# Altium PCB PCB1.PcbDoc (part 3 of 3)
Units mil, origin at the board's own origin, x right, y up, seen from the top; angles counter-clockwise.
Board outline 3898.53 x 2644.2 mil, 4 copper layers (Top Layer, Layer 1, Layer 2, Bottom Layer), stack 64.602 mil thick; 147 components, 160 nets, 823 pads, 446 vias.
Unrouted connection lines stored in the file: 1.
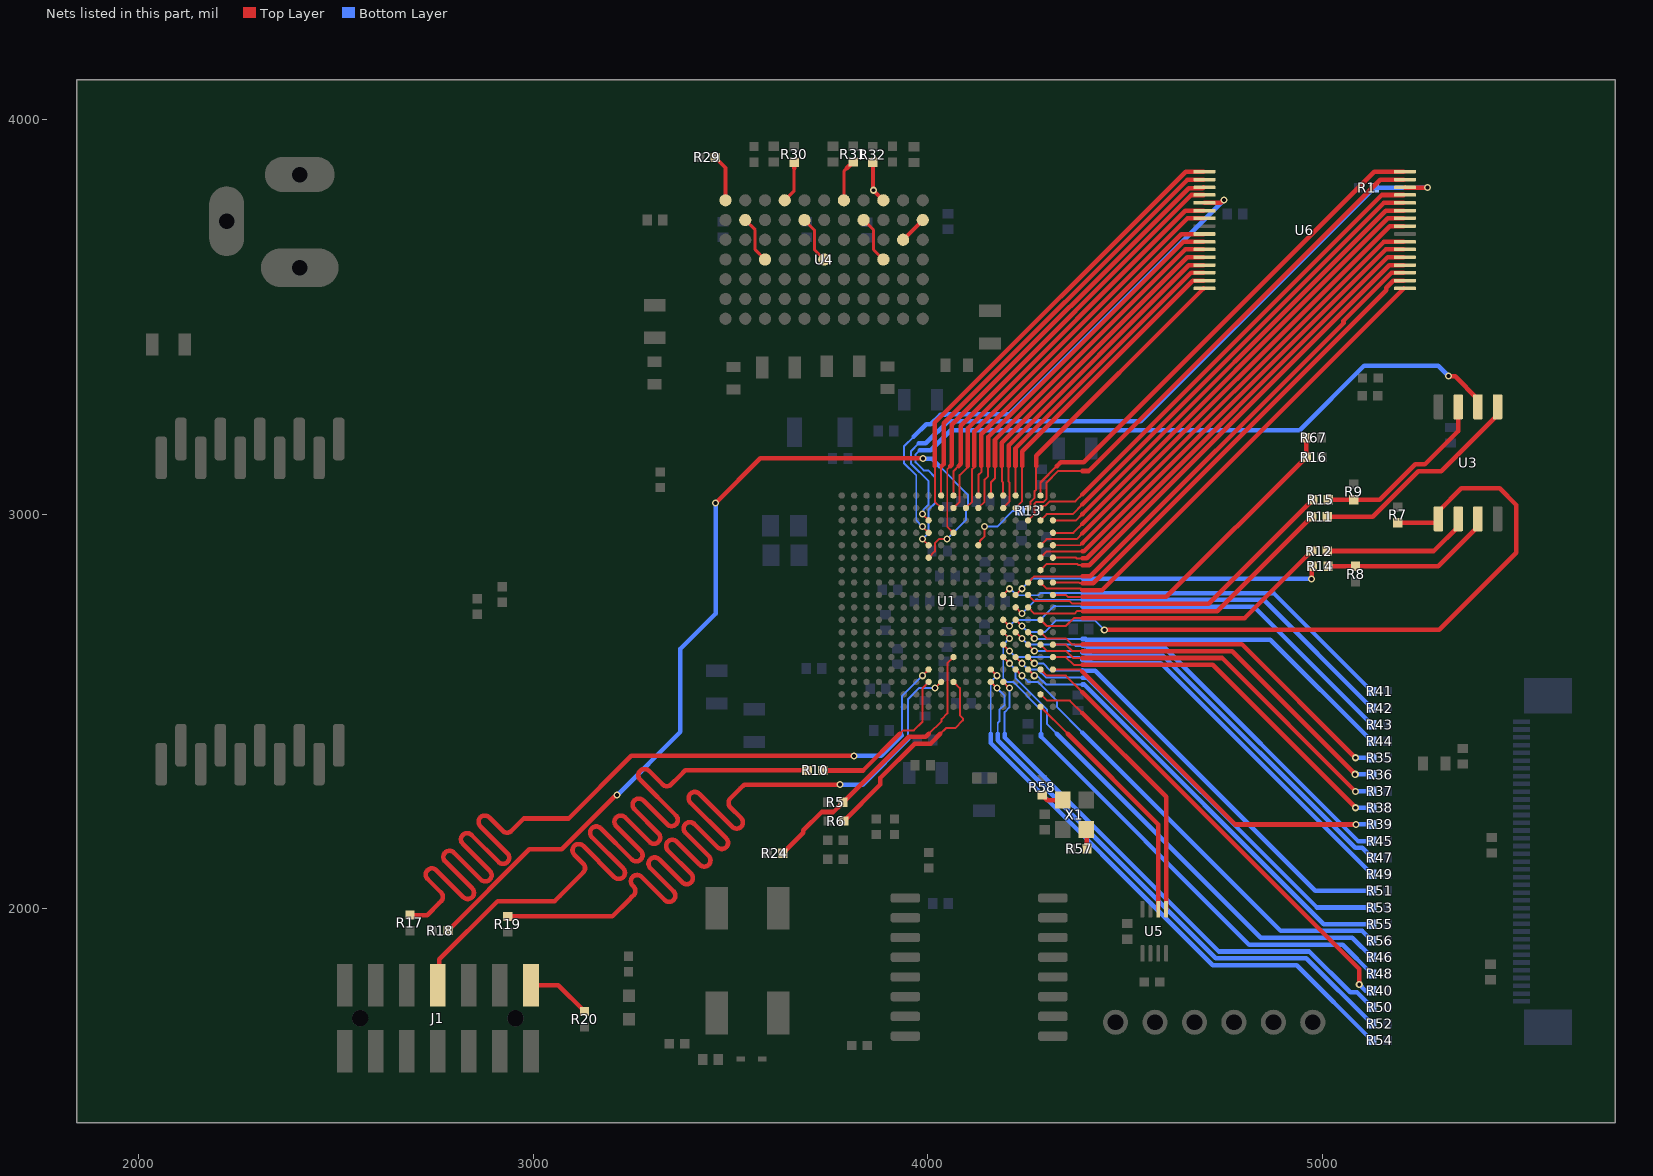
[diagram p5: the nets of this part, all layers, seen from the top]

## Via types
v1: diameter 18/10/10/18 (per signal layer), hole 10, Top Layer to Bottom Layer, tented top, 241 vias
v2: diameter 18/10/10/18 (per signal layer), hole 10, Top Layer to Bottom Layer, 173 vias
v3: diameter 30, hole 26, Top Layer to Bottom Layer, 32 vias

## Nets (pads, with @x,y where several pads share a name; then routed paths per layer and width w, separated by ;. In a path a pad name is that pad's centre, name@x,y a point inside that pad or via, vN(x,y) a via of type N, cw(c..) or ccw(c..) an arc to the next point about the centre after c; other vN are vias at no path point) (continued)
NetJ1_14: J1.14 R20.2 | length 163.4
  Top Layer w11.55: J1.14@2994.05,1806.79 3063.22,1806.79 R20.2@3129.87,1740.13
NetR6_2: R6.2 U1.T10 | length 524.7
  Top Layer w5: 4031.53,2443.9 4045.96,2458.33 4068.96,2458.33 4088.84,2478.21 4088.84,2483.01 4080.89,2490.96 4080.89,2559.59 U1.T10@4064.98,2575.51
  Top Layer w11.55: R6.2@3786.76,2222.82 3879.5,2315.55 3879.5,2332.08 3966.58,2419.17 4006.8,2419.17 4031.53,2443.9
NetR7_2: R7.2 U1.L15 U3.1 | length 1874.9
  Top Layer w5: U1.L15@4222.46,2732.99 v1(4238.21,2717.24)
  Top Layer w11.55: v2(4447.13,2707.33) 5296.27,2707.33 5491.53,2902.59 5491.53,3023.98 5449.22,3066.29 5351.92,3066.29 5294.11,3008.48 U3.1@5294.11,2988.79 5294.11,2984.98 5288.27,2979.14 R7.2@5190.65,2979.14
  Bottom Layer w5: v1(4238.21,2717.24) 4253.91,2701.54 4295.92,2701.54 4325.74,2731.37 4423.1,2731.37 v2(4447.13,2707.33)
NetR8_2: R8.2 R14.1 U3.3 | length 441.2
  Top Layer w11.55: R14.1@5014.32,2869 5014.45,2868.87 5083.85,2868.87 R8.2@5083.98,2868.74 5293.75,2868.74 5394.11,2969.11 U3.3@5394.11,2988.79
NetR9_2: R9.2 R15.1 U3.7 | length 462.3
  Top Layer w11.55: R15.1@5015.2,3037.41 R15.1@5015.2,3037.41 5079.63,3037.36 R9.2@5079.67,3037.32 5145.54,3037.32 5235.41,3127.19 5259.88,3127.19 5344.11,3211.42 U3.7@5344.11,3272.65
NetR11_1: R11.1 U3.5 | length 558.5
  Top Layer w11.55: R11.1@5012.42,2994.43 5127.16,2994.43 5242.59,3109.86 5301.01,3109.86 5444.11,3252.96 U3.5@5444.11,3272.65
NetR11_2: R11.2 U1.K16 | length 827.4
  Top Layer w5: U1.K16@4253.95,2764.49 4269.7,2748.74 4371.78,2748.74 4377.83,2754.79 4392.62,2754.79
  Top Layer w11.55: 4392.62,2754.79 4733.41,2754.79 R11.2@4973.05,2994.43
NetR12_1: R12.1 U3.2 | length 377.2
  Top Layer w11.55: R12.1@5012.23,2907.31 5282.31,2907.31 5344.11,2969.11 U3.2@5344.11,2988.79
NetR12_2: R12.2 U1.L17 | length 772.7
  Top Layer w5: U1.L17@4285.45,2732.99 4301.2,2717.24 4350.02,2717.24 4370.18,2737.4 4391.92,2737.4
  Top Layer w11.55: 4391.92,2737.4 4802.96,2737.4 R12.2@4972.86,2907.31
NetR13_1: R13.1 U1.E12 | length 161.1
  Top Layer w5: U1.E12@4127.97,2921.97 4127.97,2924.98 4132.14,2929.15 4132.14,2933.34 4143.78,2944.98 v1(4143.78,2969.35)
  Bottom Layer w5: v1(4143.78,2969.35) 4175.35,2969.35 4215.01,3009.01 R13.1@4234.57,3009.01
NetR14_2: R14.2 U1.J15 | length 801.2
  Top Layer w5: U1.J15@4222.46,2795.98 v1(4238.21,2811.73)
  Top Layer w11.55: v2(4972.1,2836.2) 4973.18,2837.29 4973.18,2867.23 R14.2@4974.95,2869
  Bottom Layer w5: v1(4238.21,2811.73) 4263.76,2837.28 4392.09,2837.28
  Bottom Layer w11.55: 4392.09,2837.28 4971.02,2837.28 v2(4972.1,2836.2)
NetR15_2: R15.2 U1.J16 | length 840.3
  Top Layer w5: U1.J16@4253.95,2795.98 4264.96,2784.97 4269.7,2780.23 4359.23,2780.23 4365.74,2773.72 4391.92,2773.72
  Top Layer w11.55: 4391.92,2773.72 4712.15,2773.72 R15.2@4975.83,3037.41
NetR16_2: R16.2 R67.1 U1.J18 | length 839.8
  Top Layer w5: U1.J18@4316.95,2795.98 4350.02,2795.98 4354.95,2791.05 4391.92,2791.05
  Top Layer w11.55: 4391.92,2791.05 4604.64,2791.05 R16.2@4958.95,3145.36 4958.58,3145.72 4958.58,3193.7 R67.1@4958.21,3194.07
NetR29_2: R29.2 U4.A7 | length 119.5
  Top Layer w10: R29.2@3461.06,3904.93 3487.16,3878.84 U4.A7@3487.16,3796.21
NetR30_2: R30.2 U4.D7 | length 106.6
  Top Layer w8: U4.D7@3637.16,3796.21 3637.16,3796.64 3660.98,3820.47 3660.98,3877.27
  Top Layer w11.55: 3660.98,3877.27 R30.2@3660.98,3892.99
NetR31_2: R31.2 U4.G7 | length 107.2
  Top Layer w8: U4.G7@3787.16,3796.21 3787.16,3869.68 3794.75,3877.27
  Top Layer w11.55: 3794.75,3877.27 R31.2@3811.01,3893.53
NetR32_2: R32.2 U4.J7 | length 107.4
  Top Layer w10: R32.2@3860.11,3892.65 3861.01,3891.75 3861.01,3822.59 v1(3861.91,3821.69) ; v1@3861.91,3821.58 U4.J7@3887.16,3796.33
NetR35_1: R35.1 U1.M17 | length 972.1
  Top Layer w5: U1.M17@4285.45,2701.49 4301.2,2685.75 4350.02,2685.75 4364.96,2670.81 4391.92,2670.81
  Top Layer w11.55: 4391.92,2670.81 4796.12,2670.81 v2(5083.62,2383.3)
  Bottom Layer w11.55: v2(5083.62,2383.3) 5084.06,2382.86 R35.1@5125.6,2382.86
NetR36_1: R36.1 U1.N18 | length 945
  Top Layer w5: U1.N18@4316.95,2670 4350.02,2670 4366.54,2653.47 4391.92,2653.47
  Top Layer w11.55: 4391.92,2653.47 4771.1,2653.47 v2(5083.15,2341.42)
  Bottom Layer w11.55: v2(5083.15,2341.42) 5083.49,2341.08 5125.26,2341.08 R36.1@5125.6,2340.74
NetR37_1: R37.1 U1.N17 | length 994.5
  Top Layer w5: U1.N17@4285.45,2670 4301.2,2654.25 4350.02,2654.25 4368.13,2636.14 4391.92,2636.14
  Top Layer w11.55: 4391.92,2636.14 4745.67,2636.14 v2(5083.86,2297.95)
  Bottom Layer w11.55: v2(5083.86,2297.95) 5084.52,2298.61 R37.1@5125.6,2298.61
NetR38_1: R38.1 U1.P18 | length 966.9
  Top Layer w5: U1.P18@4316.95,2638.5 4350.02,2638.5 4369.71,2618.81 4391.92,2618.81
  Top Layer w11.55: 4391.92,2618.81 4722.04,2618.81 v2(5084.19,2256.66)
  Bottom Layer w11.55: v2(5084.19,2256.66) 5084.36,2256.49 R38.1@5125.6,2256.49
NetR39_1: R39.1 U1.R18 | length 971.5
  Top Layer w5: U1.R18@4316.95,2607.01 4350.02,2607.01 4385.81,2607.01 4391.92,2600.9
  Top Layer w11.55: 4391.92,2600.9 4778.72,2214.09 v2(5084.74,2214.09)
  Bottom Layer w11.55: v2(5084.74,2214.09) 5085.02,2214.37 R39.1@5125.6,2214.37
NetR40_1: R40.1 U1.R17 | length 1200
  Top Layer w5: U1.R17@4285.45,2607.01 4301.2,2591.26 4350.02,2591.26 4391.92,2549.35
  Top Layer w11.55: 4391.92,2549.35 5093.38,1847.89 v2(5093.38,1809.02)
  Bottom Layer w11.55: v2(5093.38,1809.02) 5109.27,1793.13 R40.1@5125.6,1793.13
NetR41_1: R41.1 U1.J14 | length 1053.7
  Top Layer w5: U1.J14@4190.96,2795.98 v1(4206.71,2811.73)
  Bottom Layer w5: v1(4206.71,2811.73) 4208.24,2811.73 4224.76,2795.22 4280.29,2795.22 4285.91,2800.84 4391.92,2800.84
  Bottom Layer w11.55: 4391.92,2800.84 4876.12,2800.84 R41.1@5125.6,2551.36
NetR42_1: R42.1 U1.K15 | length 1037.9
  Top Layer w5: U1.K15@4222.46,2764.49 v1(4238.21,2748.74)
  Bottom Layer w5: v1(4238.21,2748.74) 4272.16,2782.69 4273.62,2784.15 4277.76,2784.15 4391.92,2783.5
  Bottom Layer w11.55: 4391.92,2783.5 4851.33,2783.5 R42.1@5125.6,2509.23
NetR43_1: R43.1 U1.L14 | length 1085.9
  Top Layer w5: U1.L14@4190.96,2732.99 v1(4206.71,2717.24)
  Bottom Layer w5: v1(4206.71,2717.24) 4222.51,2733.04 4284.89,2733.04 4317.86,2766.01 4319.32,2767.47 4323.46,2767.47 4391.92,2766.17
  Bottom Layer w11.55: 4391.92,2766.17 4826.54,2766.17 R43.1@5125.6,2467.11
NetR44_1: R44.1 U1.M16 | length 986.2
  Top Layer w5: U1.M16@4253.95,2701.49 v1(4269.7,2685.75)
  Bottom Layer w5: v1(4269.7,2685.75) 4271.23,2684.22 4391.92,2684.22
  Bottom Layer w11.55: 4400.96,2682.58 4403.77,2682.58 4403.95,2682.4 4868.18,2682.4 R44.1@5125.6,2424.98
  Bottom Layer w12.07: 4391.92,2684.22 4397.16,2684.22 4397.32,2684.05 4399.49,2684.05 4400.96,2682.58
NetR45_1: R45.1 U1.M15 | length 1120.9
  Top Layer w5: U1.M15@4222.46,2701.49 v1(4238.21,2685.75)
  Bottom Layer w5: v1(4238.21,2685.75) 4254,2669.95 4371.11,2669.95 4374.17,2666.89 4391.92,2666.89
  Bottom Layer w11.55: 4391.92,2666.89 4392.14,2666.89 4412.52,2661.94 4600.67,2661.94 5090.37,2172.24 R45.1@5125.6,2172.24
NetR46_2: R46.2 U1.P14 | length 1284.3
  Top Layer w5: U1.P14@4190.96,2638.5 v1(4206.71,2622.75)
  Bottom Layer w5: v1(4206.71,2622.75) 4222.51,2606.96 4222.51,2584.75 4302.2,2505.06 4302.2,2468.53 4326.83,2443.9
  Bottom Layer w11.55: 4326.83,2443.9 4843.77,1926.96 5076.02,1926.96 R46.2@5125.6,1877.38
NetR47_1: R47.1 U1.N16 | length 1093.3
  Top Layer w5: U1.N16@4253.95,2670 v1(4269.7,2654.25)
  Bottom Layer w5: v1(4269.7,2654.25) 4286.2,2654.25 4351.57,2654.25 4351.62,2654.2 4386.66,2654.2 4391.92,2648.93
  Bottom Layer w11.55: 4391.92,2648.93 4409.12,2644.76 4419.87,2642.14 4595.96,2642.14 5083.19,2154.91 5100.81,2154.91 R47.1@5125.6,2130.12
NetR48_2: R48.2 U1.M14 | length 1414.8
  Top Layer w5: U1.M14@4190.96,2701.49 v1(4206.71,2685.75)
  Bottom Layer w5: v1(4206.71,2685.75) 4191.01,2670.05 4191.01,2584.75 4200.21,2575.56 4216.38,2575.56 4286.67,2505.27 4286.67,2443.9
  Bottom Layer w11.55: 4286.67,2443.9 4286.67,2437.03 4814.08,1909.63 5051.22,1909.63 R48.2@5125.6,1835.25
NetR49_1: R49.1 U1.N14 | length 1173.5
  Top Layer w5: U1.N14@4190.96,2670 v1(4206.71,2654.25)
  Bottom Layer w5: v1(4206.71,2654.25) 4222.43,2638.53 4351.61,2638.53 4384.32,2638.53 4391.92,2630.93
  Bottom Layer w11.55: 4391.92,2630.93 4405.73,2627.58 4422.92,2623.39 4590.21,2623.39 R49.1@5125.6,2087.99
NetR50_2: R50.2 U1.T14 | length 1366.8
  Top Layer w5: U1.T14@4190.96,2575.51 v1(4206.71,2559.76)
  Bottom Layer w5: 4194.47,2443.9 4194.47,2473.83 4194.47,2499.04 4206.71,2511.28 v1(4206.71,2559.76)
  Bottom Layer w11.55: 4194.47,2443.9 4194.47,2434.66 4736.83,1892.3 4966.7,1892.3 5070.14,1788.85 5087.75,1788.85 R50.2@5125.6,1751.01
NetR51_1: R51.1 U1.P16 | length 1116.8
  Top Layer w5: U1.P16@4253.95,2638.5 v1(4269.7,2622.75)
  Bottom Layer w5: v1(4269.7,2622.75) 4291.88,2622.75 4310.22,2604.42 4391.92,2604.42
  Bottom Layer w11.55: 4391.92,2604.42 4423.84,2603.52 4981.49,2045.87 R51.1@5125.6,2045.87
NetR52_2: R52.2 U1.T13 | length 1415.8
  Top Layer w5: U1.T13@4159.47,2575.51 v1(4175.21,2559.76)
  Bottom Layer w5: v1(4175.21,2559.76) 4194.47,2540.51 4194.47,2517.92 4181.42,2504.87 4181.42,2475.74 4177.13,2471.46 4177.13,2443.9
  Bottom Layer w11.55: 4177.13,2443.9 4177.13,2427.48 4729.65,1874.96 4959.52,1874.96 R52.2@5125.6,1708.88
NetR53_1: R53.1 U1.P15 | length 1166.1
  Top Layer w5: U1.P15@4222.46,2638.5 v1(4238.21,2622.75)
  Bottom Layer w5: v1(4238.21,2622.75) 4253.91,2607.05 4278.88,2607.05 4299.6,2586.34 4391.92,2586.34
  Bottom Layer w11.55: 4391.92,2586.34 4403.54,2586.34 4986.14,2003.75 R53.1@5125.6,2003.75
NetR54_2: R54.2 U1.R13 | length 1477.9
  Top Layer w5: U1.R13@4159.47,2607.01 v1(4175.21,2591.26)
  Bottom Layer w5: 4159.33,2443.9 4159.33,2474.08 4159.33,2575.37 4163.55,2579.59 v1(4175.21,2591.26)
  Bottom Layer w11.55: 4159.33,2443.9 4159.33,2420.77 4722.47,1857.63 4934.73,1857.63 R54.2@5125.6,1666.76
NetR55_1: R55.1 U1.R16 | length 1139
  Top Layer w5: U1.R16@4253.95,2607.01 v1(4269.7,2591.26)
  Bottom Layer w5: v1(4269.7,2591.26) 4272.19,2588.77 4279.77,2588.77 4299.53,2569.01 4391.92,2569.01
  Bottom Layer w11.55: 4391.92,2569.01 4396.37,2569.01 5003.75,1961.62 R55.1@5125.6,1961.62
NetR56_1: R56.1 U1.R15 | length 1196.9
  Top Layer w5: U1.R15@4222.46,2607.01 v1(4238.21,2591.26)
  Bottom Layer w5: v1(4238.21,2591.26) 4253.91,2575.56 4278.72,2575.56 4326.87,2527.41 4326.87,2512.04 4391.92,2446.99
  Bottom Layer w11.55: 4391.92,2446.99 4894.62,1944.29 5100.81,1944.29 R56.1@5125.6,1919.5
NetR57_2: R57.2 X1.1 | length 49.1
  Top Layer w11.55: X1.1@4400.89,2201.2 4403.11,2198.98 R57.2@4403.11,2153.07
NetR58_2: R58.2 X1.3 | length 57.4
  Top Layer w11.55: R58.2@4289.82,2288.97 4302.78,2276.01 X1.3@4341.83,2276.01
NetU1_E8: U1.E8 U3.6 | length 1850.3
  Top Layer w5: v1(3986.24,2937.71) U1.E8@4001.98,2921.97
  Top Layer w11.55: v2(5319.23,3351.25) 5320.31,3350.17 5336.28,3350.17 5394.11,3292.33 U3.6@5394.11,3272.65
  Bottom Layer w5: 3979.75,3162.88 3979.64,3162.88 3968.92,3152.17 3968.92,3132.02 3989.42,3111.52 4001.15,3111.52 4018.07,3094.6 4018.07,3028.82 4002.03,3012.78 4002.03,2953.51 v1(3986.24,2937.71)
  Bottom Layer w11.55: 3979.75,3162.88 4007.64,3162.88 4058.4,3213.64 4942.12,3213.64 5105.59,3377.11 5293.37,3377.11 v2(5319.23,3351.25)
NetU4_B6: U4.B6 U4.C4 | length 120.7
  Top Layer w8: U4.B6@3537.16,3746.21 3562.16,3721.21 3562.16,3671.21 U4.C4@3587.16,3646.21
NetU4_E6: U4.E6 U4.F4 | length 106.7
  Top Layer w8: U4.E6@3697.06,3736.31 3712.66,3720.71 3712.66,3670.71 U4.F4@3737.16,3646.21
NetU4_H6: U4.H6 U4.J4 | length 120.7
  Top Layer w8: U4.H6@3837.16,3746.21 3862.16,3721.21 3862.16,3671.21 U4.J4@3887.16,3646.21
NetU4_K5: U4.K5 U4.L6 | length 70.7
  Top Layer w10: U4.K5@3937.16,3696.21 U4.L6@3987.16,3746.21
Reset_B: R5.2 R24.2 U1.P10 | length 719.8
  Top Layer w5: 4002.3,2443.9 4034.58,2476.18 4034.58,2481.07 4049.49,2495.97 4049.49,2623.01 U1.P10@4064.98,2638.5
  Top Layer w11.55: R24.2@3631.98,2140.93 3684.29,2193.25 3684.29,2199.13 3730.96,2245.8 3760.69,2245.8 3779.43,2264.53 R5.2@3785.07,2270.22 3951.36,2436.5 3994.9,2436.5 4002.3,2443.9
SRAM_A0: U1.G17 U6.20 | length 1243.8
  Top Layer w5: U1.G17@4285.45,2858.97 4301.2,2874.72 4350.02,2874.72 4378.14,2874.72 4381.31,2871.55 4391.92,2871.55
  Top Layer w11.55: 4391.92,2871.55 4409.43,2871.55 5169.58,3631.7 U6.20@5206.6,3631.7
SRAM_A1: U1.H16 U6.19 | length 1281.5
  Top Layer w5: U1.H16@4253.95,2827.48 4269.52,2843.05 4357.04,2843.05 4391.92,2843.05
  Top Layer w11.55: 4391.92,2843.05 4411.68,2843.05 5053.48,3484.85 5053.48,3491.09 5175.09,3612.7 U6.19@5206.6,3612.7
SRAM_A2: U1.H18 U6.18 | length 1211.7
  Top Layer w5: U1.H18@4316.95,2827.48 4350.02,2827.48 4383.56,2827.48 4385.32,2825.72 4391.92,2825.72
  Top Layer w11.55: 4391.92,2825.72 4418.86,2825.72 5161.48,3568.34 5161.48,3574.58 5179.6,3592.7 U6.18@5206.6,3592.7
SRAM_A3: U1.H17 U6.17 | length 1245.6
  Top Layer w5: U1.H17@4285.45,2827.48 4301.02,2811.91 4357.56,2811.91 4388.4,2811.91 4391.92,2808.39
  Top Layer w11.55: 4391.92,2808.39 4442.28,2808.39 U6.17@5206.6,3572.7
SRAM_A4: U1.B16 U6.16 | length 740.4
  Top Layer w5: U1.B16@4253.95,3016.45 4253.95,3019.47 4260.37,3025.89 4260.37,3032.35 4270.68,3042.66 4270.68,3059.25 4274.65,3063.22 4274.65,3122.88
  Top Layer w11.55: 4274.65,3122.88 4274.65,3148.75 U6.16@4698.6,3572.7
SRAM_A5: U1.B15 U6.15 | length 789.3
  Top Layer w5: U1.B15@4222.46,3016.45 4238.21,3032.2 4238.21,3081.02 4238.21,3121.66 4239.42,3122.88
  Top Layer w11.55: 4239.42,3122.88 4239.42,3160.52 4671.6,3592.7 U6.15@4698.6,3592.7
SRAM_A6: U1.A15 U6.14 | length 780.7
  Top Layer w5: 4222.09,3122.88 4222.09,3081.39 4222.46,3081.02 U1.A15@4222.46,3047.95
  Top Layer w11.55: 4222.09,3122.88 4222.09,3167.7 4667.09,3612.7 U6.14@4698.6,3612.7
SRAM_A7: U1.B14 U6.13 | length 848.8
  Top Layer w5: U1.B14@4190.96,3016.45 4206.71,3032.2 4206.71,3081.02 4204.76,3082.97 4204.76,3122.88
  Top Layer w11.55: 4204.76,3122.88 4204.76,3174.88 4661.58,3631.7 U6.13@4698.6,3631.7
SRAM_A8: U1.D10 U6.3 | length 1172
  Top Layer w5: 4057.34,3122.88 4049.1,3114.65 4049.1,3081.83 4049.1,2969.34 U1.D10@4064.98,2953.46
  Top Layer w11.55: 4057.34,3122.88 4060.76,3126.3 4060.76,3226.97 4660.82,3827.04 4696.93,3827.04 U6.3@4698.6,3828.7
SRAM_A9: U1.A9 U6.2 | length 1100
  Top Layer w5: U1.A9@4033.48,3047.95 4033.48,3081.02 4033.48,3121.3 4035.07,3122.88
  Top Layer w11.55: 4035.07,3122.88 4040,3127.82 4040,3230.73 4657.97,3848.7 U6.2@4698.6,3848.7
SRAM_A10: U1.C16 U6.31 | length 1349.7
  Top Layer w5: U1.C16@4253.95,2984.96 4269.7,3000.71 4269.7,3026.57 4275.19,3032.05 4293.47,3032.05 4301.26,3039.84 4301.26,3080.98 4330.5,3110.21 4391.92,3110.21
  Top Layer w11.55: 4391.92,3110.21 4407.8,3110.21 5146.29,3848.7 U6.31@5206.6,3848.7
SRAM_A11: U1.B9 U6.1 | length 1167.2
  Top Layer w5: 4017.73,3122.88 4017.73,3081.02 4017.73,3032.2 U1.B9@4033.48,3016.45
  Top Layer w11.55: 4017.73,3122.88 4017.73,3232.97 4653.46,3868.7 U6.1@4698.6,3868.7
SRAM_A12: U1.A14 U6.12 | length 841.3
  Top Layer w5: 4187.43,3122.88 4187.43,3084.56 4190.96,3081.02 U1.A14@4190.96,3047.95
  Top Layer w11.55: 4187.43,3122.88 4187.43,3182.06 4657.07,3651.7 U6.12@4698.6,3651.7
SRAM_A13: U1.A10 U6.4 | length 1042.1
  Top Layer w5: U1.A10@4064.98,3047.95 4064.98,3081.02 4064.98,3085.16 4064.98,3109.77 4078.09,3122.88
  Top Layer w11.55: 4078.09,3122.88 4083.43,3128.23 4083.43,3225.14 4668,3809.7 U6.4@4698.6,3809.7
SRAM_A14: U1.A13 U6.11 | length 874
  Top Layer w5: U1.A13@4159.47,3047.95 4159.47,3081.02 4170.09,3091.65 4170.09,3122.88
  Top Layer w11.55: 4170.09,3122.88 4170.09,3189.24 4652.56,3671.7 U6.11@4698.6,3671.7
SRAM_A15: U1.B11 U6.7 | length 1007.4
  Top Layer w5: U1.B11@4096.47,3016.45 4112.22,3032.2 4112.22,3081.02 4112.22,3115.02 4118.1,3120.9 4118.1,3122.88
  Top Layer w11.55: 4118.1,3122.88 4118.1,3210.78 4658.02,3750.7 U6.7@4698.6,3750.7
SRAM_A16: U1.B12 U6.10 | length 940.8
  Top Layer w5: U1.B12@4127.97,3016.45 4143.72,3032.2 4143.72,3081.02 4143.72,3088.02 4152.76,3097.07 4152.76,3122.88
  Top Layer w11.55: 4152.76,3122.88 4152.76,3196.42 4647.04,3690.7 U6.10@4698.6,3690.7
SRAM_A17: U1.A12 U6.9 | length 932
  Top Layer w5: U1.A12@4127.97,3047.95 4127.97,3081.02 4127.97,3100.02 4135.43,3107.48 4135.43,3122.88
  Top Layer w11.55: 4135.43,3122.88 4135.43,3203.6 4642.53,3710.7 U6.9@4698.6,3710.7
SRAM_A18: U1.B10 U6.6 | length 1042.7
  Top Layer w5: U1.B10@4064.98,3016.45 4080.7,3032.18 4080.7,3099.91 4100.77,3119.97 4100.77,3122.88
  Top Layer w11.55: 4100.77,3122.88 4100.77,3217.96 4652.51,3769.7 U6.6@4698.6,3769.7
SRAM_C\S\1\: R1.2 U1.C8 U6.30 | length 1851.4
  Top Layer w5: v1(3986.24,3000.71) U1.C8@4001.98,2984.96
  Top Layer w11.55: U6.30@5209.07,3828.89 5209.39,3828.57 5266.48,3828.57 v2(5266.8,3828.25)
  Bottom Layer w5: 3976.73,3180.22 3957.25,3160.73 3957.25,3128.49 4001.94,3083.8 4001.94,3025.7 3988.72,3012.49 3988.72,3003.19 v1(3986.24,3000.71)
  Bottom Layer w11.55: 3976.73,3180.22 3995.04,3180.22 4051.48,3236.66 4540.08,3236.66 5117.14,3813.72 ; 5117.14,3813.77 R1.2@5131.51,3828.13 5131.57,3828.19 5266.74,3828.19 v2(5266.8,3828.25)
SRAM_DQ0: U1.F18 U6.21 | length 1206.3
  Top Layer w5: U1.F18@4316.95,2890.47 4350.02,2890.47 4375.34,2890.47 4376.93,2888.89 4391.92,2888.89
  Top Layer w11.55: 4391.92,2888.89 4402.25,2888.89 5165.07,3651.7 U6.21@5206.6,3651.7
SRAM_DQ1: U1.F17 U6.22 | length 1244.7
  Top Layer w5: U1.F17@4285.45,2890.47 4301.2,2906.22 4350.02,2906.22 4391.92,2906.22
  Top Layer w11.55: 4391.92,2906.22 4395.07,2906.22 5160.56,3671.7 U6.22@5206.6,3671.7
SRAM_DQ2: U1.E18 U6.23 | length 1208.1
  Top Layer w5: U1.E18@4316.95,2921.97 4350.02,2921.97 4386.31,2921.97 4391.92,2927.58
  Top Layer w11.55: 4391.92,2927.58 5155.04,3690.7 U6.23@5206.6,3690.7
SRAM_DQ3: U1.E17 U6.25 | length 1256.1
  Top Layer w5: U1.E17@4285.45,2921.97 4301.2,2937.71 4350.02,2937.71 4377.55,2937.71 4391.92,2952.09
  Top Layer w11.55: 4391.92,2952.09 5170.53,3730.7 U6.25@5206.6,3730.7
SRAM_DQ4: U1.D18 U6.26 | length 1219.9
  Top Layer w5: U1.D18@4316.95,2953.46 4350.02,2953.46 4368.78,2953.46 4391.92,2976.6
  Top Layer w11.55: 4391.92,2976.6 5166.02,3750.7 U6.26@5206.6,3750.7
SRAM_DQ5: U1.C18 U6.27 | length 1214.7
  Top Layer w5: U1.C18@4316.95,2984.96 4350.02,2984.96 4375.77,2984.96 4391.92,3001.11
  Top Layer w11.55: 4391.92,3001.11 5160.51,3769.7 U6.27@5206.6,3769.7
SRAM_DQ6: U1.C17 U6.28 | length 1254.5
  Top Layer w5: U1.C17@4285.45,2984.96 4301.2,3000.71 4350.02,3000.71 4367,3000.71 4391.92,3025.63
  Top Layer w11.55: 4391.92,3025.63 5156,3789.7 U6.28@5206.6,3789.7
SRAM_DQ7: U1.B17 U6.29 | length 1249.7
  Top Layer w5: U1.B17@4285.45,3016.45 4288.46,3016.45 4294.06,3022.05 4297.61,3022.05 4308.74,3033.18 4323.06,3033.18 4323.12,3033.24 4374.02,3033.24 4391.92,3051.15
  Top Layer w11.55: 4391.92,3051.15 5150.48,3809.7 U6.29@5206.6,3809.7
SRAM_OE: U1.A17 U6.32 | length 1280.5
  Top Layer w5: U1.A17@4285.45,3047.95 4285.45,3081.02 4327.31,3122.88
  Top Layer w11.55: 4327.31,3122.88 4336.95,3132.52 4395.47,3132.52 5131.65,3868.7 U6.32@5206.6,3868.7
SRAM_WE: U1.D8 U6.5 | length 1368.6
  Top Layer w5: v1(3986.24,2969.21) U1.D8@4001.98,2953.46
  Top Layer w11.55: U6.5@4701.07,3789.89 4741.9,3789.89 4749.53,3797.52 v2(4751.06,3797.52)
  Bottom Layer w5: 3964.64,3197.53 3939.33,3172.22 3939.33,3130.47 3970.54,3099.26 3970.54,2984.91 v1(3986.24,2969.21)
  Bottom Layer w11.55: 3964.64,3197.53 3995.65,3228.54 4007.73,3228.54 4031.36,3252.18 4043.54,3252.18 4045.34,3253.99 4207.53,3253.99 v2(4751.06,3797.52)
TCK: R18.1 U1.F8 | length 2351.4
  Top Layer w5: U1.F8@4001.98,2890.47 4017.69,2906.17 4017.69,2927.06 4028.76,2938.13 v1(4048.89,2938.13)
  Top Layer w11.55: R18.1@2783.97,1945.43 2989.82,2151.27 3071.63,2151.27 3206.12,2285.76 3208.15,2285.76 3210.98,2288.59 v2(3212.51,2288.59) ; v2(3461.79,3028.7) 3575.13,3142.04 v2(3987.42,3142.04)
  Bottom Layer w5: 4028.52,3122.88 4101.59,3049.81 4101.59,3014.33 4096.51,3009.25 4096.51,2985.75 v1(4048.89,2938.13)
  Bottom Layer w11.55: v2(3212.51,2288.59) 3372.87,2448.94 3372.87,2659.64 3461.79,2748.56 v2(3461.79,3028.7) ; v2(3987.42,3142.04) 3988.5,3140.95 4010.45,3140.95 4028.52,3122.88
TDI: R19.1 U1.T9 | length 2472.4
  Top Layer w5: v1(4017.73,2559.76) U1.T9@4033.48,2575.51
  Top Layer w11.55: R19.1@2935.17,1981.12 3200.4,1981.12 3242.94,2023.67 3249.87,2030.6 3253.96,2034.68 ccw(c3242.8,2045.83) 3253.96,2056.99 3251.78,2059.17 cw(c3262.93,2070.33) 3251.78,2081.48 cw(c3262.93,2070.33) 3274.08,2081.48 3332.83,2022.73 ccw(c3343.99,2033.88) 3355.14,2022.73 ccw(c3343.99,2033.88) 3355.14,2045.04 3296.39,2103.79 cw(c3307.55,2114.94) 3296.39,2126.1 cw(c3307.55,2114.94) 3318.7,2126.1 3377.45,2067.35 ccw(c3388.61,2078.5) 3399.76,2067.35 ccw(c3388.61,2078.5) 3399.76,2089.66 3341.01,2148.41 cw(c3352.17,2159.56) 3341.01,2170.72 cw(c3352.17,2159.56) 3363.32,2170.72 3422.07,2111.97 ccw(c3433.23,2123.12) 3444.38,2111.97 ccw(c3433.23,2123.12) 3444.38,2134.28 3385.63,2193.03 cw(c3396.79,2204.18) 3385.63,2215.34 cw(c3396.78,2204.18) 3407.94,2215.34 3466.69,2156.58 ccw(c3477.84,2167.74) 3489,2156.58 ccw(c3477.84,2167.74) 3489,2178.89 3398.17,2269.72 cw(c3409.33,2280.88) 3398.17,2292.03 cw(c3409.33,2280.88) 3420.48,2292.03 3504.22,2208.29 ccw(c3515.37,2219.45) 3526.53,2208.29 ccw(c3515.37,2219.45) 3526.53,2230.6 3499.36,2257.77 cw(c3510.51,2268.93) 3499.36,2280.08 3524.78,2305.5 3534.62,2315.34 v2(3777.51,2315.34)
  Bottom Layer w5: 3949.59,2429.89 3949.59,2531.94 3977.41,2559.76 v1(4017.73,2559.76)
  Bottom Layer w11.55: v2(3777.51,2315.34) 3835.04,2315.34 3949.59,2429.89
TDO: J1.8 R10.2 | length 2270.7
  Top Layer w11.55: J1.8@2757.83,1806.79 2761.83,1810.79 2761.83,1872.19 2909.76,2020.12 3053.88,2020.12 3066.58,2032.83 3122.37,2088.61 3126.45,2092.7 ccw(c3115.3,2103.85) 3126.45,2115.01 3103.77,2137.69 cw(c3114.92,2148.84) 3103.77,2160 cw(c3114.92,2148.84) 3126.08,2160 3205.33,2080.75 ccw(c3216.48,2091.9) 3227.64,2080.75 ccw(c3216.48,2091.9) 3227.64,2103.06 3148.38,2182.31 cw(c3159.54,2193.46) 3148.38,2204.62 cw(c3159.54,2193.46) 3170.69,2204.62 3249.95,2125.37 ccw(c3261.1,2136.52) 3272.26,2125.37 ccw(c3261.1,2136.52) 3272.26,2147.67 3210.1,2209.83 cw(c3221.25,2220.99) 3210.1,2232.14 cw(c3221.25,2220.99) 3232.41,2232.14 3294.56,2169.98 ccw(c3305.72,2181.14) 3316.87,2169.98 ccw(c3305.72,2181.14) 3316.87,2192.29 3256.25,2252.92 cw(c3267.4,2264.07) 3256.25,2275.23 cw(c3267.4,2264.07) 3278.56,2275.23 3339.18,2214.6 ccw(c3350.34,2225.76) 3361.49,2214.6 ccw(c3350.34,2225.76) 3361.49,2236.91 3270.66,2327.74 cw(c3281.82,2338.89) 3270.66,2350.05 cw(c3281.82,2338.89) 3292.97,2350.05 3327.23,2315.79 ccw(c3338.39,2326.94) 3349.54,2315.79 3370.83,2337.07 3385.13,2351.37 3693.95,2351.37 R10.2@3694.26,2351.06
TDO_Driver: R10.1 U1.T8 | length 411.3
  Top Layer w5: 3928.49,2443.9 3937.47,2452.88 3964.72,2452.88 3986.41,2474.57 3986.41,2559.93 U1.T8@4001.98,2575.51
  Top Layer w11.55: R10.1@3733.63,2351.06 3835.66,2351.06 3928.49,2443.9
TMS: R17.1 U1.R8 | length 2453.1
  Top Layer w5: v1(3986.24,2591.26) U1.R8@4001.98,2607.01
  Top Layer w11.55: R17.1@2687.28,1984.56 2731.16,1984.56 2762,2015.4 2766.08,2019.48 ccw(c2754.93,2030.63) 2766.08,2041.79 2731.82,2076.05 cw(c2742.98,2087.2) 2731.82,2098.36 cw(c2742.98,2087.2) 2754.13,2098.36 2822.66,2029.83 ccw(c2833.82,2040.98) 2844.97,2029.83 ccw(c2833.82,2040.98) 2844.97,2052.14 2776.44,2120.67 cw(c2787.6,2131.82) 2776.44,2142.98 cw(c2787.6,2131.82) 2798.75,2142.98 2867.28,2074.45 ccw(c2878.43,2085.6) 2889.59,2074.45 ccw(c2878.43,2085.6) 2889.59,2096.76 2821.06,2165.29 cw(c2832.22,2176.44) 2821.06,2187.59 cw(c2832.22,2176.44) 2843.37,2187.59 2911.9,2119.07 ccw(c2923.05,2130.22) 2934.21,2119.07 ccw(c2923.05,2130.22) 2934.21,2141.37 2865.68,2209.9 cw(c2876.83,2221.06) 2865.68,2232.21 cw(c2876.83,2221.06) 2887.99,2232.21 2922.25,2197.95 ccw(c2933.4,2209.11) 2944.56,2197.95 2974.53,2227.92 2975.88,2229.28 3089.51,2229.28 3248.45,2388.21 v2(3812.74,2388.21)
  Bottom Layer w5: 3933.82,2440.59 3933.82,2538.84 v1(3986.24,2591.26)
  Bottom Layer w11.55: v2(3812.74,2388.21) 3882.33,2388.21 3933.82,2439.71 3933.82,2440.59
UART0_RX: U1.V17 U5.6 | length 636.8
  Top Layer w5: U1.V17@4285.45,2512.52 4354.07,2443.9
  Top Layer w11.55: 4354.07,2443.9 4583.86,2214.11 U5.6@4583.86,1999.27
UART0_TX: U1.U17 U5.5 | length 711
  Top Layer w5: U1.U17@4285.45,2544.01 4286.48,2544.01 4302.18,2528.31 4359.78,2528.31 4391.92,2496.17
  Top Layer w11.55: 4391.92,2496.17 4603.86,2284.23 U5.5@4603.86,1999.27
pads on no net: J1. J1.12 J5.12 J5.13 J5.14 J5.15 J5.21 J6.2 J6.3 J6.6 U1.A3 U1.A4 U1.B1 U1.B2 U1.B5 U1.B6 U1.C9 U1.C11 U1.C12 U1.C13 U1.C14 U1.D1 U1.D2 U1.D5 U1.D6 U1.D9 U1.D11 U1.D13 U1.D14 U1.D15 U1.D16 U1.E3 U1.E4 U1.E13 U1.E15 U1.E16 U1.F1 U1.F2 U1.F14 U1.F15 U1.G14 U1.G15 U1.G16 U1.H1 U1.H2 U1.H14 U1.J5 U1.J6 U1.K5 U1.K6 U1.K17 U1.K18 U1.L3 U1.L4 U1.L5 U1.L18 U1.M4 U1.M5 U1.M6 U1.N3 U1.N4 U1.N6 U1.P3 U1.P4 U1.P5 U1.P6 U1.R3 U1.R5 U1.R6 U1.R7 U1.T3 U1.T4 U1.T5 U1.T7 U1.T12 U1.T17 U1.T18 U1.U4 U1.U5 U1.U6 U1.U7 U1.U9 U1.U10 U1.U16 U1.V3 U1.V4 U1.V6 U1.V7 U1.V8 U1.V9 U1.V11 U1.V16 U2.4 U2.5 U2.6 U2.11 U2.12 U2.13 U2.14 U4.B7 U4.C7 U4.E7 U4.F2 U4.F3 U4.H7 U4.J2 U4.J3 U4.L7

## Polygon pours and split planes (outlines as drawn)
+3V1 on Top Layer "+3V1_L01_P026" (solid, pour order 26): 3964.47,3404.57 4057.61,3404.79 4069.4,3393.01 4069.4,3327.65 4065.62,3323.87 3983.81,3323.87 3964.02,3343.65
+3V3 on Top Layer "+3V3_L01_P023" (solid, pour order 23): 3795.83,3339.05 3796.34,3338.55 4011.86,3338.55 4011.86,3335.52 4061.83,3285.55 4007.32,3231.04 3953.31,3231.04 3953.31,3253.75 3950.79,3256.27 3793.31,3256.27
+1V8 on Top Layer "+1V8_L01_P022" (solid, pour order 22): 3236.13,3352.01 3237.24,3353.12 3452.91,3353.12 3452.91,3291.98 3390.1,3229.17 3237.79,3229.17
+1V0 on Top Layer "+1V0_L01_P015" (solid, pour order 15): 3466.53,3338.6 3467.19,3337.94 3599.82,3337.94 3599.82,3253.99 3565.52,3219.69 3519.46,3219.69 3519.46,3220.34 3465.88,3273.92
+3V1Reg on Top Layer "+3V1REG_L01_P013" (solid, pour order 13): 3838.76,3452.03 3838.95,3452.22 3984.24,3452.22 4014.99,3482.97 4014.99,3544.46 4192.09,3544.46 4193.65,3542.91 4193.65,3416.02 4132.93,3355.3 4131.76,3356.47 4074.15,3356.47 4074.15,3395 4055.47,3413.68 3877.98,3413.68 3876.81,3414.85
+3V3Reg on Top Layer "+3V3REG_L01_P012" (solid, pour order 12): 3694.77,3452.32 3695.04,3452.05 3831.23,3452.05 3881.33,3401.95 3920.65,3401.95 3920.65,3346.83 3921.05,3346.43 3703.03,3346.43 3703.03,3443.28 3702.62,3443.69
+1V0Reg on Top Layer "+1V0REG_L01_P002" (solid, pour order 2): 3637.61,3454.66 3534.75,3454.66 3480.32,3400.23 3463.18,3400.23 3463.18,3347.51 3466.61,3344.08 3599.47,3344.08 3599.47,3407.51 3637.61,3445.66
+1V8Reg on Top Layer "+1V8REG_L01_P005" (solid, pour order 5): 3445.3,3592.8 3445.3,3396.4 3407.66,3358.76 3306.3,3358.76 3306.3,3580.36
+1V8Reg on Top Layer "+1V8REG_L01_P000" (solid, pour order 0): 3494.39,3616.66
+3V3 on Layer 2 "+3V3_L03_P018" (solid, pour order 18): 3794.8,3340.9 3797.35,3338.34 4213.46,3338.34 4213.46,4096.54 4219.06,4102.14 5779.73,4102.14 5779.73,1457.94 2390.2,1457.94 2390.2,1881.18 3374.58,2258.59 3571.6,2258.59 3776.57,2463.55
GND on Layer 2 "GND_L03_P027" (solid, pour order 27): 1778.2,4102.14 1778.2,1457.94 3343.24,1457.94 3345.67,1455.51 3345.67,4097.31
+1V8 on Layer 2 "+1V8_L03_P017" (solid, pour order 17): 3454.05,3351.81 3452.99,3352.87 3235.16,3352.87 3235.16,3288.36 3709.95,2813.57 3709.95,2530.17 3776.57,2463.55 3925.67,2463.55 3925.67,2492.37 4017.73,2559.76 4063.91,2564.61 4197.32,2564.61 4197.32,2895.41 4141.99,2950.75 4098.16,2950.75 4098.16,2857.29 4143.72,2811.73 4139.81,2807.82 4139.81,2762.12 4090.1,2712.44 4090.1,2676.37 4055.98,2676.37 3942.5,2789.86 3942.5,2964.14
+3V3 on Layer 2 "+3V3_L03_P011" (solid, pour order 11): 3953.39,3151.1 3954.74,3149.75 3954.74,2924.46 3991.21,2924.46 4009.72,2942.97 4009.72,3016.36 4059.33,3016.36 4078.74,3035.77 4078.74,3150.09
+5 on Layer 2 "+5_L03_P024" (solid, pour order 24): 2300.35,3732.34 2481.55,3732.34 2851.35,4102.14 3345.67,4097.31 4217.97,4097.31 4217.97,3556.33 4212.79,3551.15 2300.36,3551.15
+1V8 on Layer 2 "+1V8_L03_P021" (solid, pour order 21): 3246.26,3352.2 1994.12,3352.2 1994.12,3182.12 1994.12,2151.54 3083.48,2151.54 3139.13,2207.19 3139.13,2293.45 3350.61,2504.92 3336.69,2518.83 3336.69,2689.96 3429.91,2783.17 3428.52,2784.56 3428.52,3125.43
+1V8 on Layer 2 "+1V8_L03_P020" (solid, pour order 20): 3523.12,3018.3 3468.86,2964.04 3468.86,2706.65 3375.65,2613.44 3382.6,2606.48 3382.6,2390.83 3240.69,2248.93 3276.87,2212.75 3610.77,2212.75 3610.77,2243.36 3818.07,2450.66 3723.47,2545.27 3723.47,2827.69
GND on Layer 2 "GND_L03_P019" (solid, pour order 19): 3413.54,3098.38 3409.68,3094.52 3409.68,2791.69 3307.45,2689.47 3307.45,2477.29 3130,2299.84 3130,2195.68 3226.44,2195.68 3438.61,2407.86 3436.68,2409.78 3436.68,2637.39 3531.2,2731.9 3529.27,2733.83 3529.27,3100.31
+1V0 on Layer 2 "+1V0_L03_P016" (solid, pour order 16): 3466.61,3344.08 3469.02,3346.49 3702.48,3346.49 3702.48,3343.71 3831.25,3157.85 4042.43,3054.41 4040.19,2921.27 4079.86,2921.27 4124.92,2921.27 4124.92,2864.18 4160.88,2828.22 4159.09,2826.42 4159.09,2764.72 4126.79,2732.43 4129.91,2689.81 4156.97,2658.54 4149.15,2636.58 4124.4,2613.38 4103.81,2613.38 4096.32,2637.14 4095.19,2636.58 4052.94,2636.58 4052.94,2630.95 4030.13,2608.13 4029.28,2608.98 3998.02,2608.98 3998.02,2620.63 3938.17,2680.47 3938.17,2856.48 3929.25,2856.48 3615.71,3170.02 3569.65,3170.02 3466.2,3273.48
+1V0Reg on Layer 2 "+1V0REG_L03_P014" (solid, pour order 14): 3637.04,3546.21 3587.16,3546.21 3587.04,3546.1 3587.04,3496.21 3537.16,3496.21 3534.75,3493.81 3534.75,3454.66 3480.32,3400.23 3463.18,3400.23 3463.18,3347.51 3466.61,3344.08 3599.47,3344.08 3599.47,3407.51 3637.61,3445.66
+1V8Reg on Layer 2 "+1V8REG_L03_P010" (solid, pour order 10): 3488.05,3598.22 3491.49,3594.79 3491.49,3441.21 3490.11,3441.21 3407.66,3358.76 3306.3,3358.76 3306.3,3580.36 3306.65,3580.7
+3V1Reg on Layer 2 "+3V1REG_L03_P009" (solid, pour order 9): 3836.52,3544.81 3837.03,3544.29 4193.28,3544.29 4193.28,3410.89 4136.04,3353.64 4133.48,3356.2 4074.19,3356.2 4074.19,3395.56 4055.79,3413.96 3838.56,3413.96
+3V3Reg on Layer 2 "+3V3REG_L03_P006" (solid, pour order 6): 3786.96,3547.09 3787.34,3546.71 3787.34,3495.33 3787.75,3495.33 3880.69,3402.39 3921.04,3402.39 3921.04,3346.49 3702.48,3346.49 3702.48,3444.42 3684.83,3462.08 3685.67,3462.92 3685.67,3546.56
+3V1 on Bottom Layer "+3V1_L04_P025" (solid, pour order 25): 3964.47,3404.57 4057.61,3404.79 4069.4,3393.01 4069.4,3327.65 4065.62,3323.87 3983.81,3323.87 3964.02,3343.65
GND on Layer 1 "GND_L02_P004" (solid, pour order 4): 1778.2,4102.14 5779.73,4102.14 5779.73,1457.94 1778.2,1457.94

## Keep-outs
Keep-Out Layer:
  the board outline again, w10

## Text inside footprints (layer, text, board x,y; h text height)
J6: Top Overlay "1" at 4419.06,1751.68 h32; Top Overlay "6" at 5018.76,1747.26 h32; Mechanical 16 "1" at 4353.97,1687.95 h77.5; Mechanical 16 "6" at 5056.76,1687.95 h77.5
U4: Top Overlay "A1" at 3389.52,3443.37 h32; Top Overlay "L7" at 4025.67,3798.89 h32; Top Overlay "L1" at 4012.2,3415.31 h32